# EAGLE board hip4081 (EAGLE 5.06)
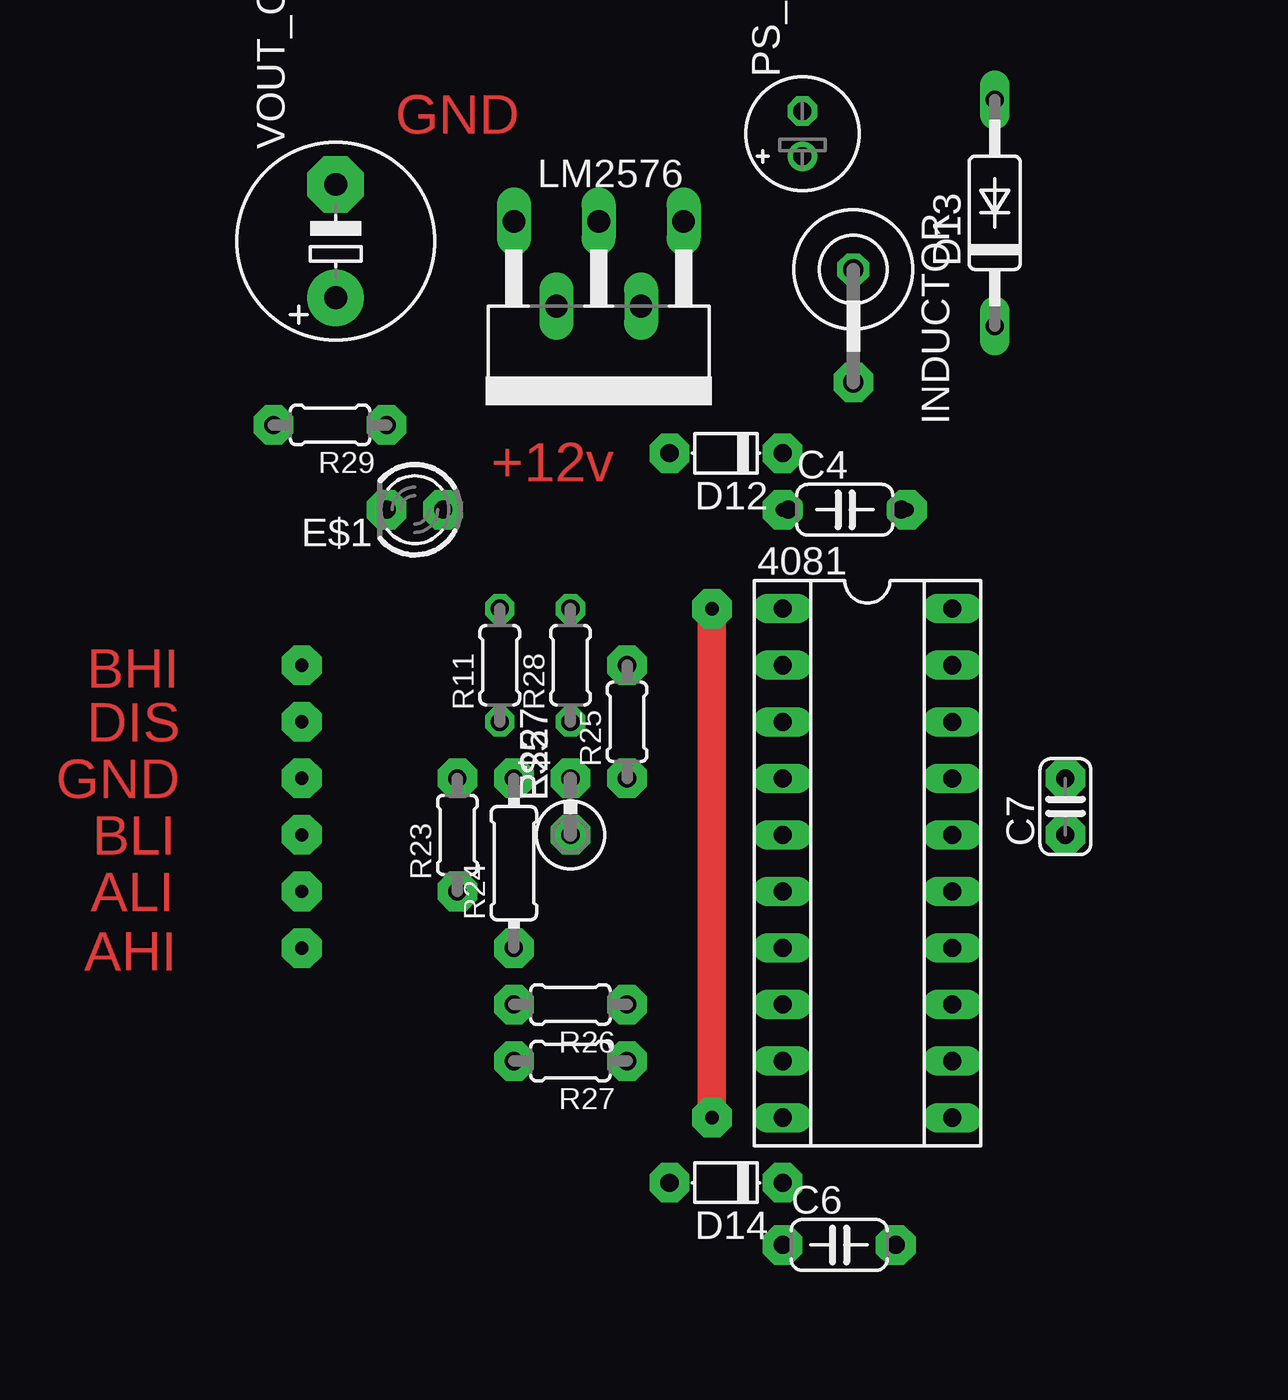
[diagram p0: board, top side]
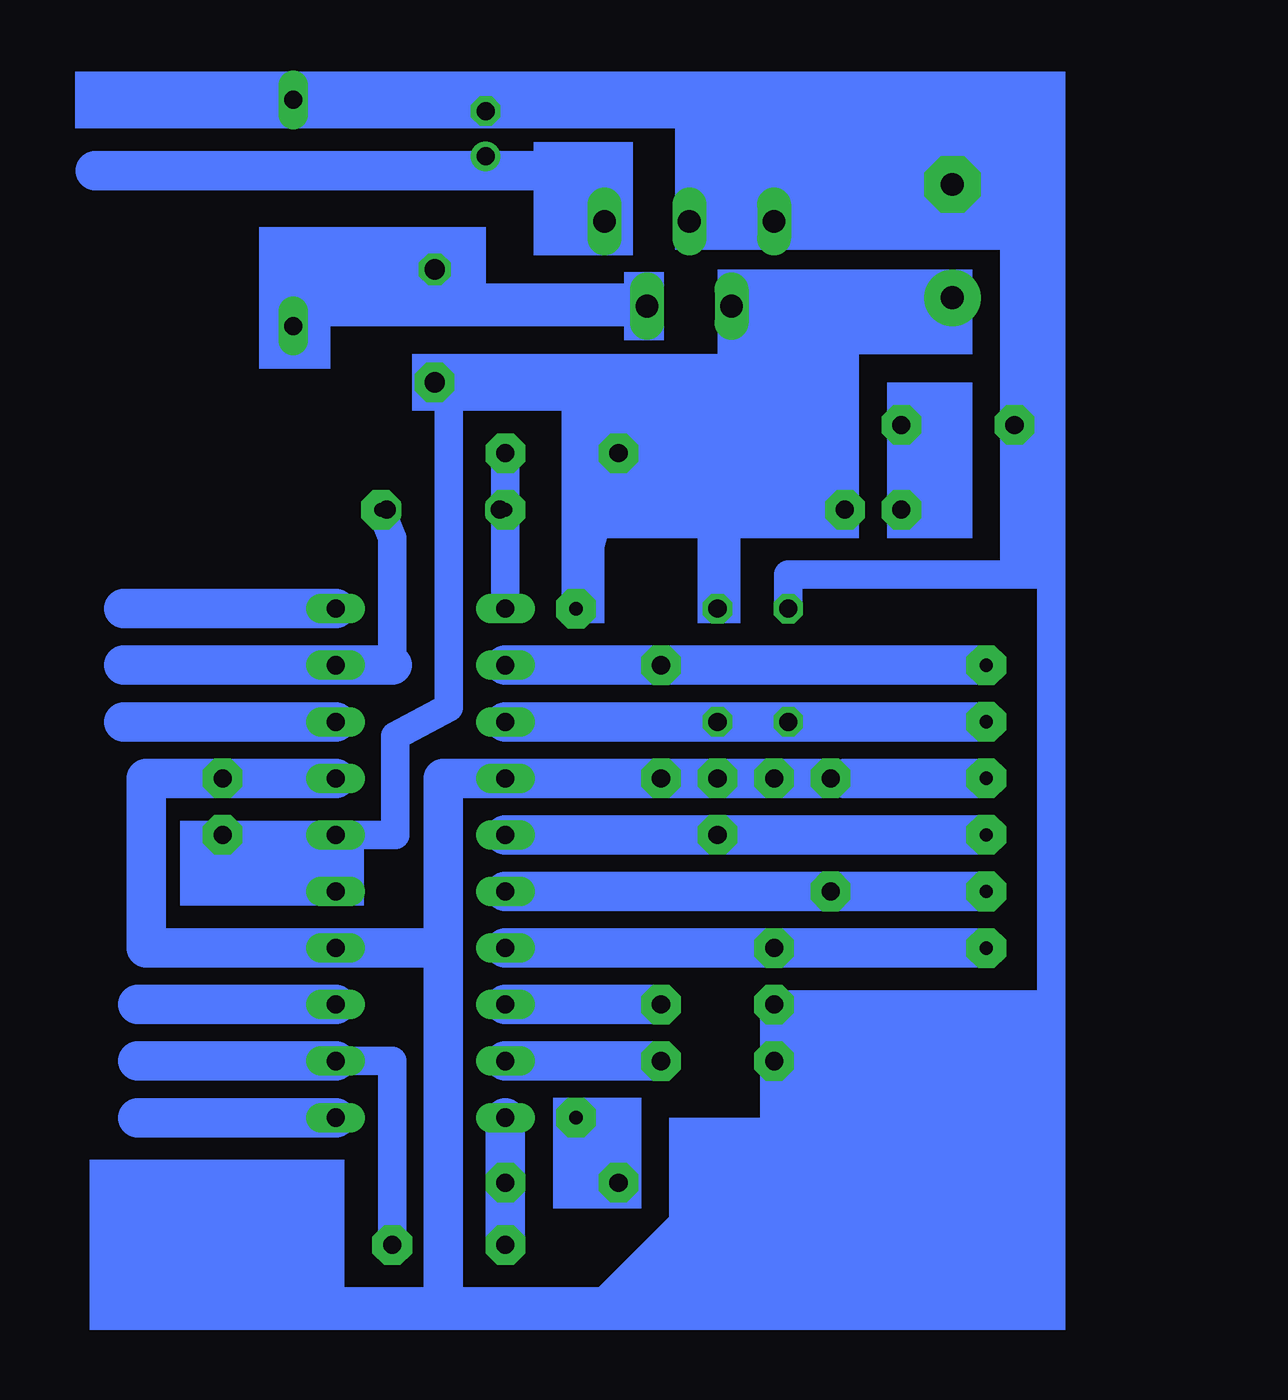
[diagram p1: board, bottom side, seen from below]

No outline drawn. Coordinates in mm, seen from the top.
Copper layers (1*16): Top 0.035mm / dielectric 1.5mm / Bottom 0.035mm
Design rules "default": minimum track width 10mil, minimum drill 24mil, track to track 8mil, track to pad 8mil, pad to pad 8mil, via to via 8mil, smd to smd 8mil, copper to edge 40mil, drill to drill 8mil, minimum pad ring 10mil, minimum via ring 8mil, stop-mask expansion 4mil, vias tented up to drill 0mil, thermal gap 10mil

## Footprints (pad centres in the part's own frame; a part is rotated, then mirrored left to right if it is on the bottom)
SOCKET-20 = drill 0.813 long: 1 -11.43,-3.81; 2 -8.89,-3.81; 3 -6.35,-3.81; 4 -3.81,-3.81; 5 -1.27,-3.81; 6 1.27,-3.81; 7 3.81,-3.81; 8 6.35,-3.81; 9 8.89,-3.81; 10 11.43,-3.81; 11 11.43,3.81; 12 8.89,3.81; 13 6.35,3.81; 14 3.81,3.81; 15 1.27,3.81; 16 -1.27,3.81; 17 -3.81,3.81; 18 -6.35,3.81; 19 -8.89,3.81; 20 -11.43,3.81
C050-024X044 = drill 0.813 octagon: 1 -2.54,0; 2 2.54,0
C025-024X044 = drill 0.813 octagon: 1 -1.27,0; 2 1.27,0
D-5 = drill 0.813 octagon: A 2.54,0; C -2.54,0
C2992 = drill 0.813 long: A 5.08,0; C -5.08,0
LED3MM = drill 0.813 octagon: A -1.27,0; K 1.27,0
0309V = drill 0.813 octagon: 1 -1.27,0; 2 1.27,0
LBC-SE = drill 0.914 octagon: 1 -2.54,0; 2 2.54,0
CB360 = drill 1.016 long: 1 -3.81,-8.255; 2 -1.905,-4.445; 3 0,-8.255; 4 1.905,-4.445; 5 3.81,-8.255
E2-5 = drill 0.813 pad 1.27 round: + -1.016,0 | drill 0.813 pad 1.27 octagon: - 1.016,0
0204/5 = drill 0.813 octagon: 1 -2.54,0; 2 2.54,0
0204/7 = drill 0.813 octagon: 1 -3.81,0; 2 3.81,0
E5-8,5 = drill 1.016 pad 2.54 round: + -2.54,0 | drill 1.016 pad 2.54 octagon: - 2.54,0

## Placement (x,y rotation side)
4081  [SOCKET-20]  43.56,43.81 270 top
C4  [C050-024X044]  42.55,59.69 0 top
C6  [C050-024X044]  42.29,26.67 0 top
C7  .47uf  [C025-024X044]  52.45,46.35 90 top
D12  [D-5]  37.21,62.23 180 top
D13  [C2992]  49.28,73.03 90 top
D14  [D-5]  37.21,29.46 180 top
E$1  [LED3MM]  23.24,59.69 180 top
E$57  [0309V]  30.23,46.35 90 top
INDUCTOR  330uH  [LBC-SE]  42.93,67.94 270 top
LM2576  [CB360]  31.5,64.39 180 top
PS_CAP2  100uF  [E2-5]  40.64,76.58 90 top
R11  [0204/5]  27.05,52.7 90 top
R22  [0309V]  30.23,46.35 90 top
R23  [0204/5]  25.15,45.09 90 top
R24  [0204/7]  27.69,43.81 90 top
R25  [0204/5]  32.77,50.16 90 top
R26  [0204/5]  30.23,37.47 180 top
R27  [0204/5]  30.23,34.92 180 top
R28  [0204/5]  30.23,52.7 90 top
R29  [0204/5]  19.43,63.5 180 top
VOUT_CAP  1000uf  [E5-8,5]  19.68,71.75 90 top

## Library data of the parts
4081 = ic-package
C4 C6 C7 E$57 PS_CAP2 R11 R22-R29 VOUT_CAP = rcl
D12-D14 = diode
E$1 = led
INDUCTOR = inductors
LM2576 = linear

## Nets
GND2: 4081.4
R24: 4081.5
S$2: 4081.19
S$4: 4081.11
S$10: 4081.18
S$11: 4081.15 4081.16
S$19: 4081.12
S$30: 4081.14 4081.17
S$33: 4081.10
S$34: 4081.1
S$37: INDUCTOR.1
S$41: R11.2
S$43: R28.2
S$76: 4081.2
S$78: 4081.3
S$80: 4081.9
S$81: 4081.8
S$83: 4081.6
S$84: 4081.7

## Tracks (layer width: path | path; a pad name or v marks a point on that pad's centre or on a via)
GND2  (via drill 0.6 pad 1.78)
  Bottom 1.27: v27.69,37.47 v27.69,34.92 27.69,31.75 35.94,23.5 42.55,24.13
  Bottom 1.778: 42.55,24.13 42.55,47.62 4081.4 v32.77,47.62 v30.23,47.62 v27.69,47.62 v25.15,47.62
R24  (via drill 0.6 pad 1.78)
  Bottom 1.778: 4081.5 v30.23,45.09 v18.16,45.09
S$1
  Bottom 1.27: 15.24,78.74 15.24,31.75 27.94,31.75
S$2  (via drill 0.6 pad 1.78)
  Bottom 1.27: 4081.19 44.83,52.7 44.83,58.42 v45.34,59.69
  Bottom 1.778: 44.83,52.7 56.9,52.7
S$4
  Bottom 1.778: 4081.11 56.26,32.38 | 47.37,37.47 56.26,37.47
S$10
  Bottom 1.778: 4081.18 56.9,50.16 | 47.37,55.24 56.9,55.24
S$11  (via drill 0.6 pad 1.78)
  Top 1.27: v36.58,32.38 v36.58,55.24
  Bottom 1.016: 4081.16 4081.15 | 28.96,68.58 28.96,65.41 36.58,65.41 | 36.58,65.41 42.29,65.41 | v34.67,62.23 36.58,65.41 | v34.67,62.23 36.58,64.77 | v36.58,55.24 v34.67,62.23
  Bottom 1.27: 53.72,42.55 4081.15 4081.16 | 4081.16 v52.45,45.09 | 4081.16 44.7,45.09 44.7,49.53 42.29,50.8 42.29,65.41 | v36.58,32.38 34.67,32.38 v34.67,29.46 34.67,29.34
S$19  (via drill 0.6 pad 1.78)
  Bottom 1.27: 4081.12 44.83,34.92 v44.83,26.67
  Bottom 1.778: 4081.12 56.26,34.92
S$30  (via drill 0.6 pad 1.78)
  Bottom 0.813: 42.93,23.5 42.93,40.01
  Bottom 1.27: 42.93,23.5 49.28,23.5
  Bottom 1.778: 42.93,40.01 4081.14 55.88,40.01 55.88,47.62 v52.45,47.62 4081.17
S$33  (via drill 0.6 pad 1.78)
  Bottom 1.778: v39.75,26.67 v39.75,29.46 4081.10
S$34  (via drill 0.6 pad 1.78)
  Bottom 1.27: 4081.1 v39.75,59.69 | 39.75,60.33 v39.75,59.69 | v39.75,59.69 39.75,59.05 | v39.75,59.69 v39.75,62.23
S$37
  Bottom 1.016: INDUCTOR.1 42.93,69.22 34.04,69.22
S$39  (via drill 0.6 pad 1.78)
  other vias: 42.93,65.41
S$41
  Bottom 1.27: R11.2 27.05,56.77 15.75,56.77
S$42
  Bottom 1.016: 35.31,71.75 35.31,74.93
  Bottom 1.778: 35.31,74.93 58.17,74.93
S$43
  Bottom 1.27: 30.23,55.5 R28.2 30.23,58.67
S$44  (via drill 0.6 pad 1.78)
  Bottom 1.778: v18.16,47.62 24.51,47.62
S$45
  Bottom 1.016: 31.5,71.75 31.5,78.74
S$46  (via drill 0.6 pad 1.78)
  other vias: 24.51,59.69
S$47  (via drill 0.6 pad 1.78)
  other vias: 21.97,59.69
S$48  (via drill 0.6 pad 1.78)
  other vias: 21.97,63.5
S$49  (via drill 0.6 pad 1.78)
  other vias: 16.89,63.5
S$76  (via drill 0.6 pad 1.78)
  Bottom 1.778: 4081.2 v32.77,52.7 v18.16,52.7
S$78  (via drill 0.6 pad 1.78)
  Bottom 1.778: v18.16,50.16 4081.3
S$80  (via drill 0.6 pad 1.78)
  Bottom 1.778: v32.77,34.92 4081.9
S$81  (via drill 0.6 pad 1.78)
  Bottom 1.778: v32.77,37.47 4081.8
S$83  (via drill 0.6 pad 1.78)
  Bottom 1.778: 4081.6 v25.15,42.55 v18.16,42.55
S$84  (via drill 0.6 pad 1.78)
  Bottom 1.778: 4081.7 v27.69,40.01 v18.16,40.01
(copper drawn outside any net)
  shapes: Bottom area x30

## Text on the board
Top: GND | +12v | BHI | DIS | GND | BLI | ALI | AHI